# EAGLE board Beefy_3_Panel_v10 (EAGLE 7.5.0), part 1 of 6
DESIGNER: Brent Wilkins; VERSION: v10
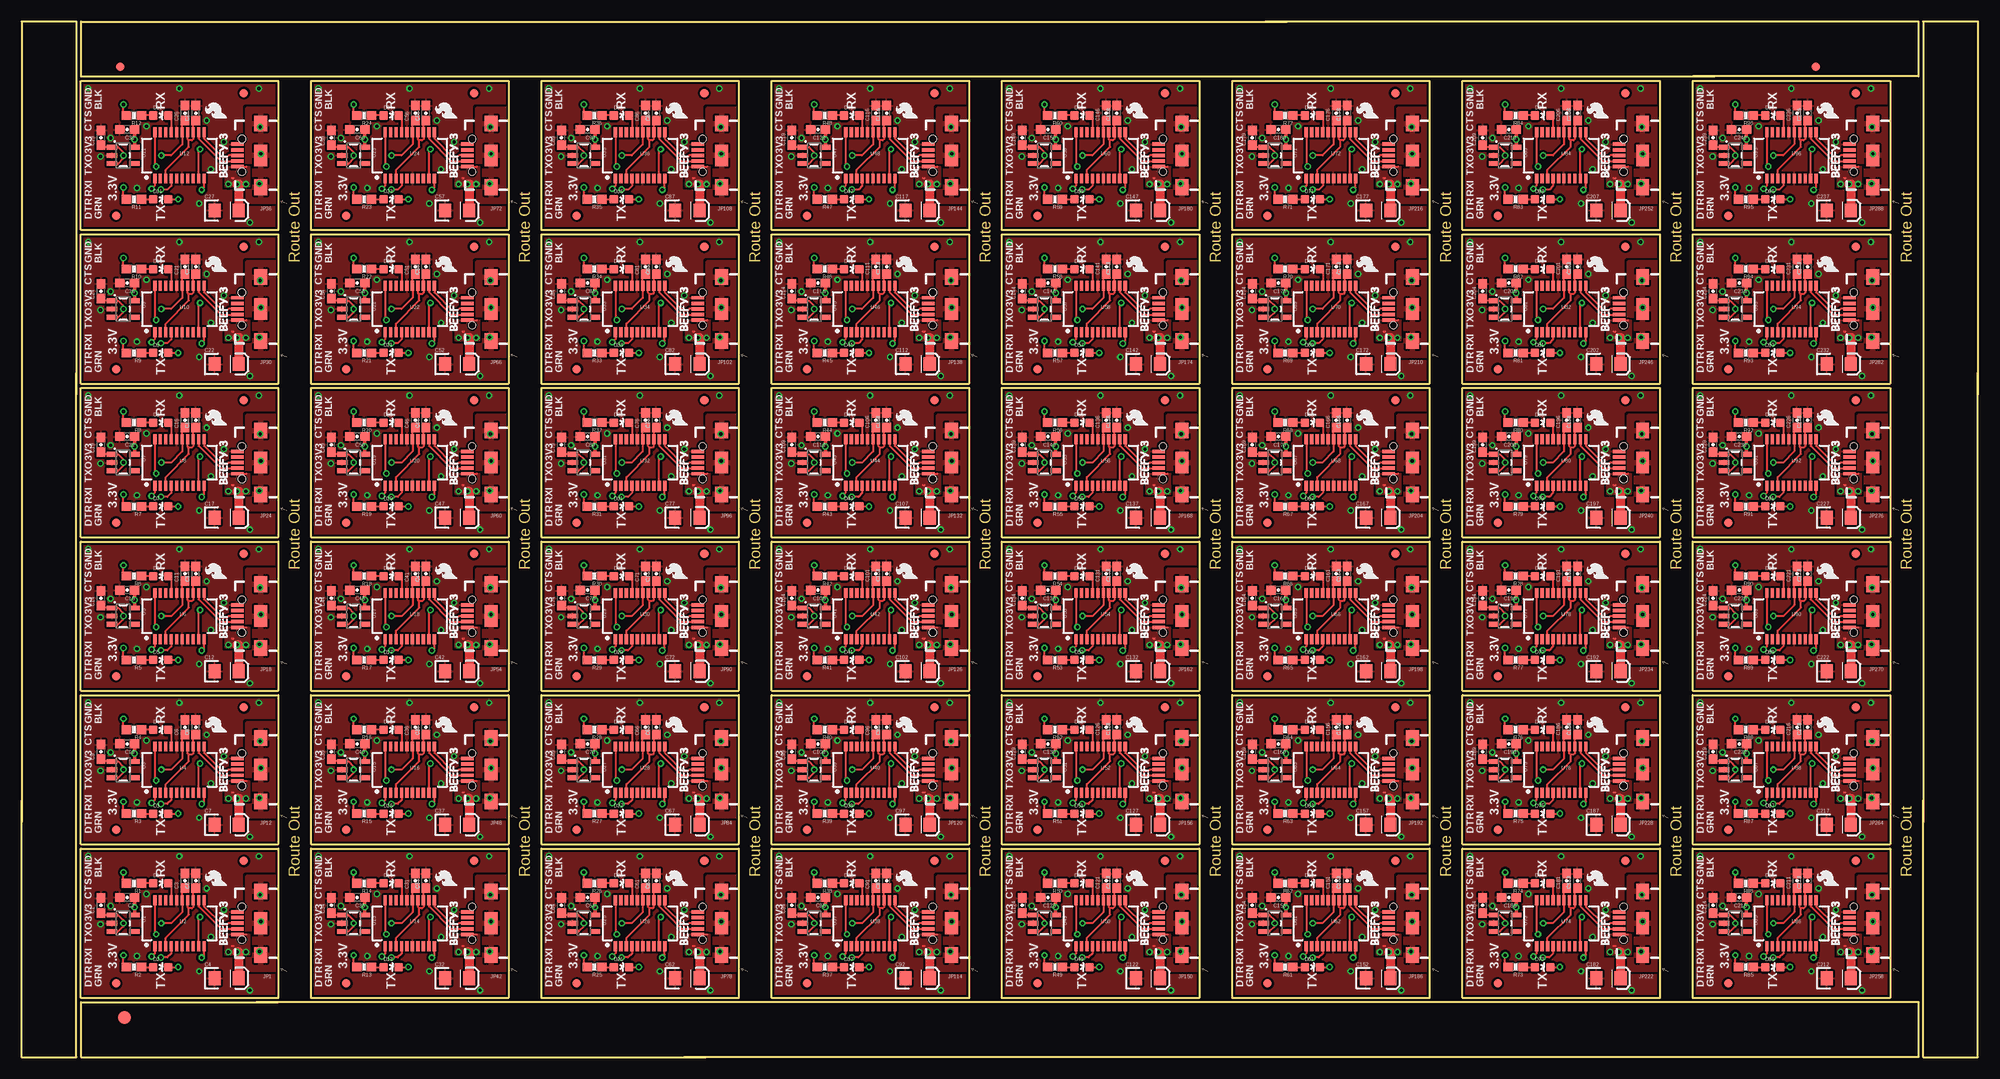
[diagram p0: board, top side]
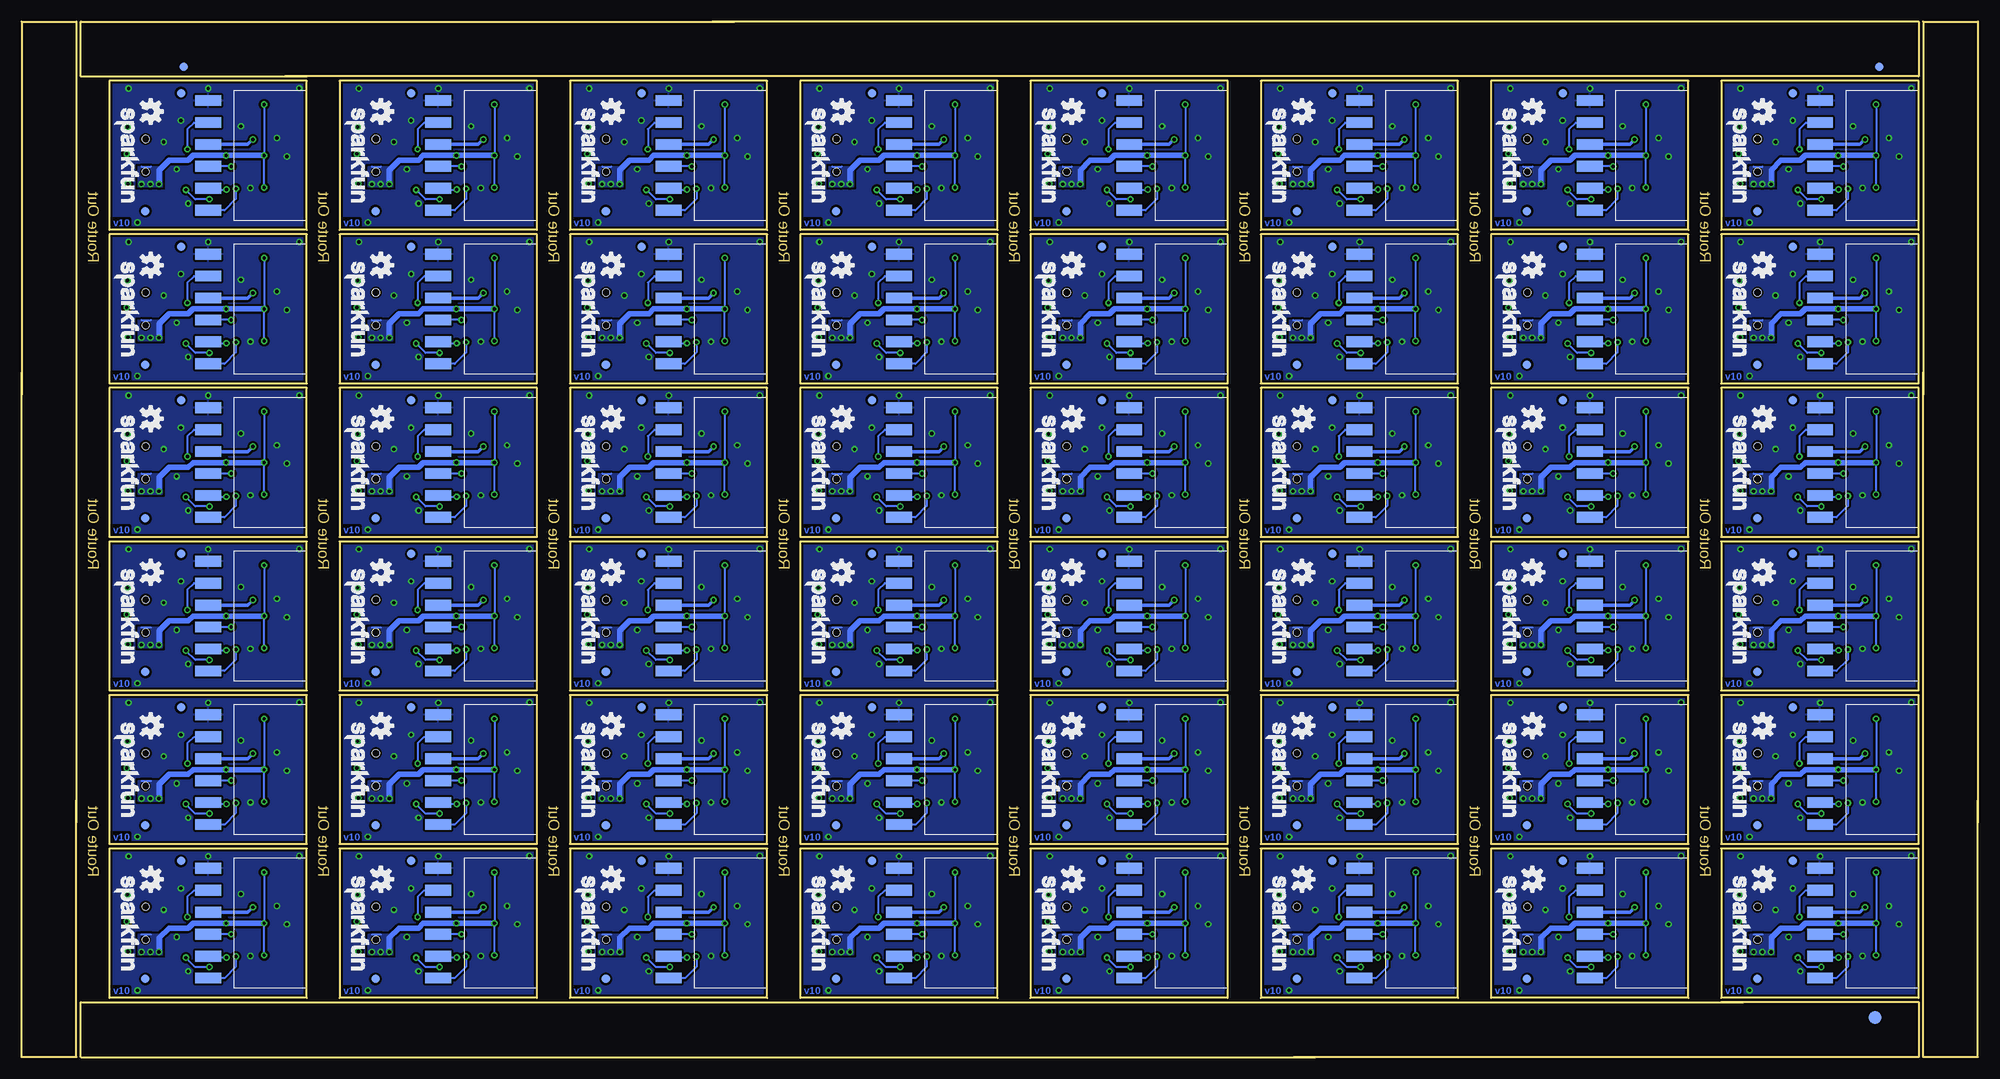
[diagram p1: board, bottom side, seen from below]

Size 226.57 x 119.89 mm. Coordinates in mm from the lower left corner, seen from the top.
Outline: 6.35,79.25 6.35,0 0,0 0,29.72
Outline: 0,27.18 0,119.89 6.35,119.89 6.35,76.71
Outline: 79.25,0 6.86,0 6.86,6.35 29.72,6.35
Outline: 27.18,6.35 219.71,6.35 219.71,0 76.71,0
Outline: 226.57,79.25 226.57,0 220.22,0 220.22,29.72
Outline: 220.22,27.18 220.22,119.89 226.57,119.89 226.57,76.71
Outline: 144.02,119.89 219.71,119.89 219.71,113.54 193.55,113.54
Outline: 196.09,113.54 6.86,113.54 6.86,119.89 146.56,119.89
Outline: 29.72,24.13 29.72,6.86 6.86,6.86 6.86,24.13 29.72,24.13
Outline: 29.72,41.91 29.72,24.64 6.86,24.64 6.86,41.91 29.72,41.91
Outline: 29.72,59.69 29.72,42.42 6.86,42.42 6.86,59.69 29.72,59.69
Outline: 29.72,77.47 29.72,60.2 6.86,60.2 6.86,77.47 29.72,77.47
Outline: 29.72,95.25 29.72,77.98 6.86,77.98 6.86,95.25 29.72,95.25
Outline: 29.72,113.03 29.72,95.76 6.86,95.76 6.86,113.03 29.72,113.03
Outline: 56.39,24.13 56.39,6.86 33.53,6.86 33.53,24.13 56.39,24.13
Outline: 56.39,41.91 56.39,24.64 33.53,24.64 33.53,41.91 56.39,41.91
Outline: 56.39,59.69 56.39,42.42 33.53,42.42 33.53,59.69 56.39,59.69
Outline: 56.39,77.47 56.39,60.2 33.53,60.2 33.53,77.47 56.39,77.47
Outline: 56.39,95.25 56.39,77.98 33.53,77.98 33.53,95.25 56.39,95.25
Outline: 56.39,113.03 56.39,95.76 33.53,95.76 33.53,113.03 56.39,113.03
Outline: 83.06,24.13 83.06,6.86 60.2,6.86 60.2,24.13 83.06,24.13
Outline: 83.06,41.91 83.06,24.64 60.2,24.64 60.2,41.91 83.06,41.91
Outline: 83.06,59.69 83.06,42.42 60.2,42.42 60.2,59.69 83.06,59.69
Outline: 83.06,77.47 83.06,60.2 60.2,60.2 60.2,77.47 83.06,77.47
Outline: 83.06,95.25 83.06,77.98 60.2,77.98 60.2,95.25 83.06,95.25
Outline: 83.06,113.03 83.06,95.76 60.2,95.76 60.2,113.03 83.06,113.03
Outline: 109.73,24.13 109.73,6.86 86.87,6.86 86.87,24.13 109.73,24.13
Outline: 109.73,41.91 109.73,24.64 86.87,24.64 86.87,41.91 109.73,41.91
Outline: 109.73,59.69 109.73,42.42 86.87,42.42 86.87,59.69 109.73,59.69
Outline: 109.73,77.47 109.73,60.2 86.87,60.2 86.87,77.47 109.73,77.47
Outline: 109.73,95.25 109.73,77.98 86.87,77.98 86.87,95.25 109.73,95.25
Outline: 109.73,113.03 109.73,95.76 86.87,95.76 86.87,113.03 109.73,113.03
Outline: 136.4,24.13 136.4,6.86 113.54,6.86 113.54,24.13 136.4,24.13
Outline: 136.4,41.91 136.4,24.64 113.54,24.64 113.54,41.91 136.4,41.91
Outline: 136.4,59.69 136.4,42.42 113.54,42.42 113.54,59.69 136.4,59.69
Outline: 136.4,77.47 136.4,60.2 113.54,60.2 113.54,77.47 136.4,77.47
Outline: 136.4,95.25 136.4,77.98 113.54,77.98 113.54,95.25 136.4,95.25
Outline: 136.4,113.03 136.4,95.76 113.54,95.76 113.54,113.03 136.4,113.03
Outline: 163.07,24.13 163.07,6.86 140.21,6.86 140.21,24.13 163.07,24.13
Outline: 163.07,41.91 163.07,24.64 140.21,24.64 140.21,41.91 163.07,41.91
Outline: 163.07,59.69 163.07,42.42 140.21,42.42 140.21,59.69 163.07,59.69
Outline: 163.07,77.47 163.07,60.2 140.21,60.2 140.21,77.47 163.07,77.47
Outline: 163.07,95.25 163.07,77.98 140.21,77.98 140.21,95.25 163.07,95.25
Outline: 163.07,113.03 163.07,95.76 140.21,95.76 140.21,113.03 163.07,113.03
Outline: 189.74,24.13 189.74,6.86 166.88,6.86 166.88,24.13 189.74,24.13
Outline: 189.74,41.91 189.74,24.64 166.88,24.64 166.88,41.91 189.74,41.91
Outline: 189.74,59.69 189.74,42.42 166.88,42.42 166.88,59.69 189.74,59.69
Outline: 189.74,77.47 189.74,60.2 166.88,60.2 166.88,77.47 189.74,77.47
Outline: 189.74,95.25 189.74,77.98 166.88,77.98 166.88,95.25 189.74,95.25
Outline: 189.74,113.03 189.74,95.76 166.88,95.76 166.88,113.03 189.74,113.03
Outline: 216.41,24.13 216.41,6.86 193.55,6.86 193.55,24.13 216.41,24.13
Outline: 216.41,41.91 216.41,24.64 193.55,24.64 193.55,41.91 216.41,41.91
Outline: 216.41,59.69 216.41,42.42 193.55,42.42 193.55,59.69 216.41,59.69
Outline: 216.41,77.47 216.41,60.2 193.55,60.2 193.55,77.47 216.41,77.47
Outline: 216.41,95.25 216.41,77.98 193.55,77.98 193.55,95.25 216.41,95.25
Outline: 216.41,113.03 216.41,95.76 193.55,95.76 193.55,113.03 216.41,113.03
Copper layers (1*16): Top 0.035mm / dielectric 1.5mm / Bottom 0.035mm
Design rules "SparkFun-2-layer-TIGHT": minimum track width 7mil, minimum drill 15mil, track to track 7mil, track to pad 7mil, pad to pad 7mil, via to via 7mil, smd to smd 7mil, copper to edge 7mil, drill to drill 7mil, minimum pad ring 7mil, minimum via ring 7mil, stop-mask expansion 4mil, vias tented up to drill 20mil, thermal gap 10mil
Net classes: 1 power: width 0.254 mm

## Footprints (pad centres in the part's own frame; a part is rotated, then mirrored left to right if it is on the bottom)
0603-CAP = smd 1.1 x 1: 1 -0.85,0; 2 0.85,0
EIA3216 = smd 1.4 x 1.6: A 1.4,0; C -1.4,0
LED-0603 = smd 1 x 1: A 0,-0.877; C 0,0.877
FIDUCIAL-1.5X3 = smd 1.5 x 1.5: 1 0,0
FIDUCIAL-1X2 = smd 1 x 1: 1 0,0
USB-B-MICRO-SMD_V03 = smd 1.45 x 0.4: D+1 2.725,0; D-1 2.725,0.65; GND1 2.725,-1.3; ID1 2.725,-0.65; VBUS1 2.725,1.3 | smd 1.5 x 1.8: SHIELD1 0,3.685; SHIELD2 0,-3.685 | smd 1.5 x 2.5: SHIELD3 0,0 | hole 0.85: 2.2,1.9; 2.2,-1.9
1X06-SMD-FEMALE-V2 = smd 1.25 x 3: 1 6.35,3.425; 2 3.81,3.425; 3 1.27,3.425; 4 -1.27,3.425; 5 -3.81,3.425; 6 -6.35,3.425
0603-RES = smd 1.1 x 1: 1 -0.85,0; 2 0.85,0
SOT23-5 = smd 0.55 x 1.2: 1 -0.95,-1.3; 2 0,-1.3; 3 0.95,-1.3; 4 0.95,1.3; 5 -0.95,1.3
SSOP20_L = smd 0.381 x 1.143: 1 -2.857,-2.68; 2 -2.223,-2.68; 3 -1.587,-2.68; 4 -0.953,-2.68; 5 -0.318,-2.68; 6 0.318,-2.68; 7 0.953,-2.68; 8 1.587,-2.68; 9 2.223,-2.68; 10 2.857,-2.68; 11 2.857,2.68; 12 2.223,2.68; 13 1.587,2.68; 14 0.953,2.68; 15 0.318,2.68; 16 -0.318,2.68; 17 -0.953,2.68; 18 -1.587,2.68; 19 -2.223,2.68; 20 -2.857,2.68